# Altium PCB termometr.PcbDoc
Units mm, origin at the board's own origin, x right, y up, seen from the top; angles counter-clockwise.
Board outline 95 x 55 mm, 2 copper layers (Top Layer, Bottom Layer); 40 components, 40 nets, 140 pads, 4 vias.
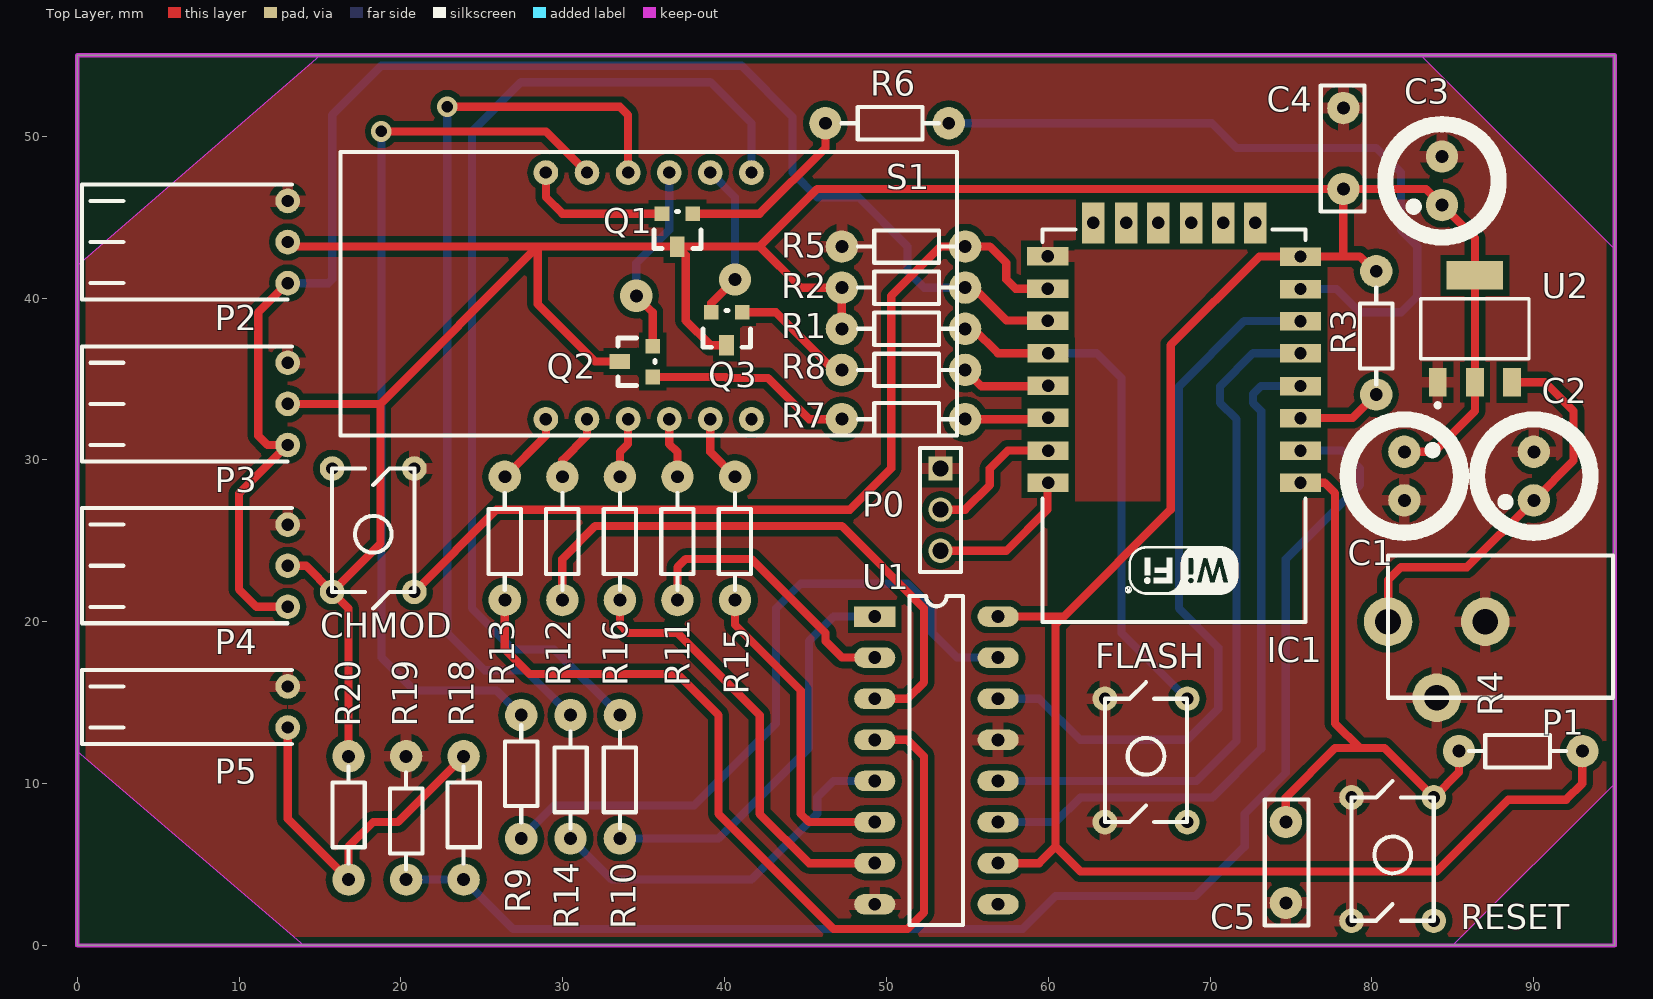
[diagram p0: Top Layer view]
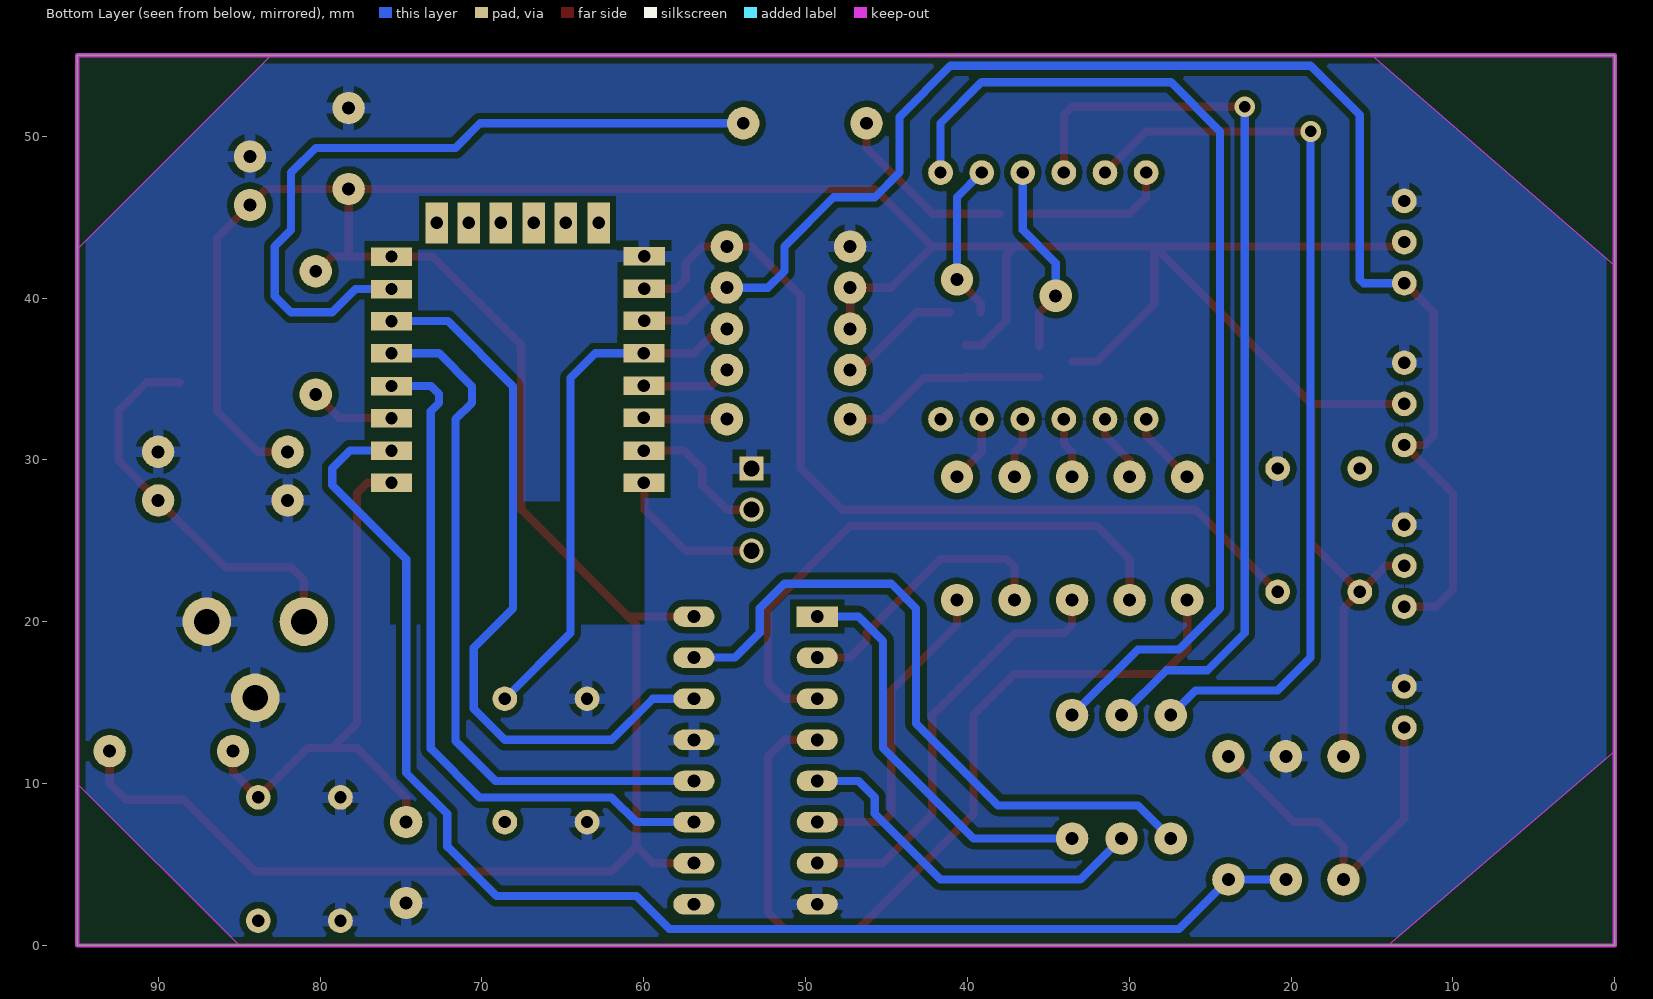
[diagram p1: Bottom Layer view, seen from below]

## Layer stack, top to bottom
Top Layer: signal copper 0.0356
Dielectric: dielectric 0.32, FR-4, Dk 4.8
Bottom Layer: signal copper 0.0356

## Board outline
0,0 95,0 95,55 0,55

## Design rules (kind name [scope] priority, off if disabled: settings)
Clearance [All] p1: gap=0.4
PolygonConnect [All] p1: connectstyle=Relief reliefconductorwidth=0.7 reliefentries=4 polygonreliefangle="90 Angle" airgapwidth=0.4
RoutingVias [All] p1: holewidth=0.711 width=1.27 viastyle="Through Hole" minholewidth=0.711 minwidth=1.27 maxholewidth=0.711 maxwidth=1.27
SilkscreenOverComponentPads [All] p1: minsilkscreentomaskgap=0.254
SolderMaskExpansion [All] p1: expansion=0.102
Width [All] p1: maxlimit=0.762 minlimit=0.381 preferedwidth=0.508 minimp=50.000000 maximp=50.000000 favimp=50.000000
27 further rules are at their usual default settings.

## Components (designator, comment, footprint, x,y, rotation, side; value= is the part's Value field where it differs from the comment)
C1 "10uF" "THT CAPACITOR_ELECTROLITIC" 90,29 r90 top
C2 "10uF" "THT CAPACITOR_ELECTROLITIC" 82,29 r270 top
C3 "100uF" "THT CAPACITOR_ELECTROLITIC" 84.328,47.244 r90 top
C4 "100nF" "THT CAP CERAMIC" 78.232,46.736 r90 top
C5 "100nF" "THT CAP CERAMIC" 74.676,7.62 r270 top
CHMOD "tact-switch" tact-switch 20.828,29.464 r180 top
FLASH "tact-switch" tact-switch 63.5,7.62 r0 top
IC1 "ESP8266 ESP-12-E" "ESP8266 ESP-12-E" 59,45 r180 top
P0 "PROGRAMING" "3pin 2.54" 53.34,29.464 r270 top
P1 "POWER" DC_BARREL 81,20 r270 top
P2 "ONEWIRE 1" "Molex KK 254 socket 3pin" 13,46 r270 top
P3 "ONEWIRE 2" "Molex KK 254 socket 3pin" 13,36 r270 top
P4 "ONEWIRE 3" "Molex KK 254 socket 3pin" 13,26 r270 top
P5 "THERMISTOR" "Molex KK 254 socket 2pin" 13,16 r270 top
Q1 "NPN" SOT-23 37.084,44.196 r180 top
Q2 "NPN" SOT-23 34.544,36.068 r90 top
Q3 "NPN" SOT-23 40.132,38.1 r180 top
R1 "10K" "THT resistor" 47.244,38.1 r0 top
R2 "4K7" "THT resistor" 47.244,40.64 r0 top
R3 "10K" "THT resistor" 80.264,41.656 r270 top
R4 "10K" "THT resistor" 93,12 r180 top
R5 "10K" "THT resistor" 47.244,43.18 r0 top
R6 "4K7" "THT resistor" 46.228,50.8 r0 top
R7 "4K7" "THT resistor" 47.244,32.512 r0 top
R8 "4K7" "THT resistor" 47.244,35.56 r0 top
R9 "100" "THT resistor" 27.432,6.604 r90 top
R10 "100" "THT resistor" 33.528,14.224 r270 top
R11 "100" "THT resistor" 37.084,28.956 r270 top
R12 "100" "THT resistor" 29.972,28.956 r270 top
R13 "100" "THT resistor" 26.416,28.956 r270 top
R14 "100" "THT resistor" 30.48,14.224 r270 top
R15 "100" "THT resistor" 40.64,28.956 r270 top
R16 "100" "THT resistor" 33.528,28.956 r270 top
R18 "220k(1%)" "THT resistor" 23.876,4.064 r90 top
R19 "100k(1%)" "THT resistor" 20.32,11.684 r270 top
R20 "10K" "THT resistor" 16.764,4.064 r90 top
RESET "tact-switch" tact-switch 78.74,1.524 r0 top
S1 "7seg display" "7SEG DISPLAY" 28.956,32.512 r0 top
U1 "74HC595N" 74HC595N 49.276,20.32 r0 top
U2 "TS1117BCW-3.3" SOT-223-2 86.36,38.1 r0 top

## Footprints (in the part's own frame and the unit in brackets; to place one, negate y for a bottom-side part, rotate by r counter-clockwise, add the part's x,y. Pads: shape width x height; smd on the part's side, far side on the other; paste and mask are expansions set on the pad)
"3pin 2.54" [mm] "Listwa ko³kowa, raster 2.54mm"
  rect 1.5x1.5 hole 1: 1(0,0)
  round 1.5 hole 1: 2(2.54,0) 3(5.08,0)
  silkscreen extent -1.27,-1.27 6.4,1.27
"7SEG DISPLAY" [mil] "Wyœwietlacz siedmiosegmentowy 3-cyfrowy"
  round 60 hole 30: 1(0,600) 2(100,600) 3(200,600) 4(300,600) 5(400,600) 6(500,600) 7(500,0) 8(400,0) 9(300,0) 10(200,0) 11(100,0) 12(0,0)
  silkscreen extent -500,-40 1000,650
74HC595N [mil]
  rect 100x50 hole 31.5: 1(0,0)
  oval 100x50 hole 31.5: 2(0,-100) 3(0,-200) 4(0,-300) 5(0,-400) 6(0,-500) 7(0,-600) 8(0,-700) 9(300,-700) 10(300,-600) 11(300,-500) 12(300,-400) 13(300,-300) 14(300,-200) 15(300,-100) 16(300,0)
  silkscreen extent 85,-750 215,50
DC_BARREL [mm]
  round 3 hole 1.6: 1(0,6) 1(4.7,3) 2(0,0)
  silkscreen extent -4.1,0 4.7,13.9
"ESP8266 ESP-12-E" [mil] "ESP8266 ESP-12-E"
  rect 100x45 hole 30: 1(-653,646) 2(-653,568) 3(-653,489) 4(-653,411) 5(-653,331) 6(-653,253) 7(-653,175) 8(-653,96) 15(-38,95) 16(-38,174) 17(-38,252) 18(-39,331) 19(-39,410) 20(-39,488) 21(-39,568) 22(-39,646)
  rect 55x100 hole 30: 9(-543,14) 10(-465,14) 11(-387,14) 12(-307,14) 13(-229,14) 14(-149,14)
  silkscreen extent -665,30 -25,985, body extent -660,38 -30,982, height 86
"Molex KK 254 socket 2pin" [mil]
  round 60 hole 30: 1(0,0) 2(100,0)
  silkscreen extent -40,-500 140,10
"Molex KK 254 socket 3pin" [mil]
  round 60 hole 30: 1(0,0) 2(100,0) 3(200,0)
  silkscreen extent -40,-500 240,10
SOT-23 [mil]
  rect 36x36 smd: 1(-37.5,-40) 2(37.5,-40)
  rect 36x50 smd: 3(0.5,40)
  silkscreen extent -57,-45 57,45, body extent -59,-58 59,66, height 43
SOT-223-2 [mm] "SOT-223/SC-73; 4 Leads; Body 6.7 x 7.3 mm, inc. leads (LxW max)"
  rect 1.1x1.75 smd: 1(-2.3,-3.3) 2(0,-3.3) 3(2.3,-3.3)
  rect 3.5x1.75 smd: 2(0,3.3)
  silkscreen extent -3.35,-4.85 3.35,1.85, body extent -3.35,-3.7 3.35,3.5, height 1.85
tact-switch [mil]
  round 60 hole 30: 1(0,0) 2(200,0) 3(200,300) 4(0,300)
  silkscreen extent 0,0 200,340
"THT CAP CERAMIC" [mm]
  round 2 hole 0.8: 1(0,0) 2(5,0)
  silkscreen extent -1.4,-1.3 6.4,1.4
"THT CAPACITOR_ELECTROLITIC" [mm]
  round 2 hole 0.8: 1(-1.5,0) 2(1.5,0)
  silkscreen extent -3.5,-3.5 3.5,3.5
"THT resistor" [mm]
  round 2 hole 0.8: 1(0,0) 2(7.62,0)
  silkscreen extent 1,-1 7,1

## Part data
C1 C2 C3: library part "C Pol", "Polarized Capacitor"
C4 C5: library part CAP, "capacitor"
P0 P2 P3 P4: library part "Header 3", "Header, 3-Pin"
P1 P5: library part "Header 2", "Header, 2-Pin"
R1 R2 R3 R4 R5 R6 R7 R8 R9 R10 R11 R12 R13 R14 R15 R16 R20: library part RES, "resistor"
R18 R19: library part SMT_R_0402, "Surface mount resistor 0402"
U2: library part "ldo sot-223"

## Via types
v1: diameter 1.27, hole 0.711, Top Layer to Bottom Layer, 2 vias
v2: diameter 2, hole 0.8, Top Layer to Bottom Layer, 2 vias

## Nets (pads, with @x,y where several pads share a name; then routed paths per layer and width w, separated by ;. In a path a pad name is that pad's centre, name@x,y a point inside that pad or via, vN(x,y) a via of type N, cw(c..) or ccw(c..) an arc to the next point about the centre after c; other vN are vias at no path point)
3V3: C2.1 C3.1 C4.1 CHMOD.3 IC1.8 P2.2 P3.2 P4.2 Q1.3 Q2.3 Q3.3 R1.1 R2.1 R3.1 R4.1 R20.2 U1.10 U1.16 U2.2 | length 269.3
  Top Layer w0.508: P4.2 14.132,23.46 CHMOD.3 ; P3.2 18.728,33.46 ; P2.2 13.28,43.18 28.448,43.18 ; R20.2 16.764,20.828 CHMOD.3 ; Q2.3 31.991,36.081 28.448,39.624 28.448,43.18 ; 33.528,43.18 28.448,43.18 ; Q3.3 39.116,37.084 37.592,38.608 37.592,42.659 Q1.3 ; R1.1 R2.1 44.704,40.64 42.164,43.18 ; U1.10 59.436,5.08 60.452,6.096 ; U1.16 60.96,20.32 ; R3.1 80.154,41.656 79.248,42.562 78.232,42.562 ; C2.1 83.84,30.5 86.36,33.02 86.36,34.8 86.36,41.4 86.36,43.712 C3.1 83.336,46.736 C4.1 ; R4.1 93,10 92,9 88.428,9 84,4.572 61.976,4.572 60.452,6.096 ; CHMOD.3 18.728,24.824 18.728,33.46 ; 18.728,33.46 28.448,43.18 ; 28.448,43.18 Q1.3 ; Q1.3 42.164,43.18 ; 42.164,43.18 45.72,46.736 C4.1 ; 60.452,6.096 60.452,19.812 60.96,20.32 ; 60.96,20.32 67.564,26.924 67.564,37.084 73.042,42.562 IC1.8 78.232,42.562 ; 78.232,42.562 C4.1
5V: C1.1 P1.2 U2.3 | length 24.7
  Top Layer w0.508: P1.2 81,22.58 81.788,23.368 85.868,23.368 C1.1 92.456,29.956 92.456,33.02 90.676,34.8 U2.3
A: R9.2 S1.2 | length 56.4
  Top Layer w0.508: v1(18.796,50.292) 28.956,50.292 S1.2
  Bottom Layer w0.508: v1(18.796,50.292) 18.796,17.78 20.828,15.748 25.908,15.748 R9.2
ADC: IC1.2 R18.1 R19.2 | length 85.6
  Bottom Layer w0.508: R19.2 R18.1 26.924,1.016 58.42,1.016 60.452,3.048 69.088,3.048 72.136,6.096 72.136,8.128 74.676,10.668 74.676,23.876 79.248,28.448 79.248,29.464 78.139,30.573 IC1.2
"ADC EX": P5.2 R18.2 R20.1 | length 22.4
  Top Layer w0.508: P5.2 13,7.828 R20.1 16.764,6.096 18.288,7.62 19.812,7.62 R18.2
B: R10.1 S1.6 | length 64
  Bottom Layer w0.508: R10.1 29.464,18.288 26.924,18.288 24.384,20.828 24.384,50.292 27.432,53.34 39.116,53.34 41.656,50.8 S1.6
C: R11.1 S1.9 | length 3.8
  Top Layer w0.508: S1.9 36.576,30.988 37.084,30.48 R11.1
D: R12.1 S1.11 | length 4.2
  Top Layer w0.508: R12.1 29.972,29.972 31.496,31.496 S1.11
DP: R16.1 S1.10 | length 3.8
  Top Layer w0.508: R16.1 33.528,30.48 34.036,30.988 S1.10
E: R13.1 S1.12 | length 4.6
  Top Layer w0.508: R13.1 28.956,31.496 S1.12
EN: IC1.3 R3.2 | length 5.3
  Top Layer w0.508: IC1.3 78.807,32.579 R3.2
F: R14.1 S1.3 | length 57.2
  Top Layer w0.508: v1(22.86,51.816) 33.528,51.816 34.036,51.308 S1.3
  Bottom Layer w0.508: v1(22.86,51.816) 22.86,19.304 25.164,17 27.704,17 R14.1
G: R15.1 S1.8 | length 4.2
  Top Layer w0.508: S1.8 39.116,30.48 R15.1
GND: C1.2 C2.2 C3.2 C4.2 C5.2 CHMOD.1 FLASH.1 FLASH.4 IC1.15 P0.1 P1.1 P2.1 P3.1 P4.1 P5.1 R5.1 R19.1 RESET.1 RESET.4 U1.8 U1.13 U2.1
GPIO0: FLASH.3 IC1.18 R1.2 | length 32.4
  Top Layer w0.508: R1.2 55.372,38.1 56.879,36.593 IC1.18
  Bottom Layer w0.508: IC1.18 62.975,36.593 64.516,35.052 64.516,19.304 FLASH.3
GPIO2: IC1.17 P2.3 P3.3 P4.3 R2.2 | length 93.8
  Top Layer w0.508: P4.3 11.08,20.92 10,22 10,27.92 P3.3 11.752,30.92 11.176,31.496 11.176,39.096 P2.3 ; R2.2 55.372,40.64 57.404,38.608 59.956,38.608 IC1.17
  Bottom Layer w0.508: P2.3 15.52,40.92 15.748,41.148 15.748,51.308 18.796,54.356 41.04,54.356 44.196,51.2 44.196,47.752 45.72,46.228 48.26,46.228 51.308,43.18 51.308,41.656 52.324,40.64 R2.2
GPIO4: IC1.19 R8.2 | length 5.6
  Top Layer w0.508: R8.2 55.88,34.544 59.949,34.544 IC1.19
GPIO5: IC1.20 R7.2 | length 5.2
  Top Layer w0.508: R7.2 59.898,32.512 IC1.20
GPIO12: IC1.6 U1.14 | length 45.6
  Bottom Layer w0.508: U1.14 59.436,15.24 61.976,12.7 68.58,12.7 70.5,14.62 70.5,18.4 68.072,20.828 68.072,34.544 72.102,38.574 IC1.6
GPIO13: IC1.7 R6.2 | length 45.5
  Bottom Layer w0.508: R6.2 70.104,50.8 71.628,49.276 80.264,49.276 81.788,47.752 81.788,44.196 82.804,43.18 82.804,40.132 81.788,39.116 79.248,39.116 77.809,40.555 IC1.7
GPIO14: IC1.5 U1.12 | length 43.9
  Bottom Layer w0.508: U1.12 69.16,10.16 71.628,12.628 71.628,32.512 70.612,33.528 70.612,34.544 72.661,36.593 IC1.5
GPIO15: CHMOD.4 IC1.16 R5.2 | length 55.9
  Top Layer w0.508: CHMOD.4 25.908,26.924 47.752,26.924 50.292,29.464 50.292,40.132 53.34,43.18 R5.2 56.388,43.18 57.404,42.164 57.404,41.148 57.972,40.58 IC1.16
GPIO16: IC1.4 U1.11 | length 43.4
  Bottom Layer w0.508: U1.11 60.452,7.62 61.976,9.144 70.144,9.144 73.152,12.152 73.152,33.02 72.644,33.528 72.644,34.069 73.135,34.561 IC1.4
NetQ1_1: Q1.1 R6.1 | length 11.4
  Top Layer w0.508: Q1.1 42.164,45.212 46.228,49.276 R6.1
NetQ1_2: Q1.2 S1.1 | length 9.1
  Top Layer w0.508: S1.1 28.956,46.228 29.972,45.212 Q1.2
NetQ2_1: Q2.1 R7.1 | length 12.8
  Top Layer w0.508: Q2.1 40.069,35.115 40.132,35.052 42.672,35.052 45.212,32.512 R7.1
NetQ2_2: Q2.2 S1.4 | length 12
  Top Layer w0.508: v2(34.544,40.132) 35.56,39.116 Q2.2
  Bottom Layer w0.508: v2(34.544,40.132) 34.544,42.164 36.576,44.196 S1.4
NetQ3_1: Q3.1 R8.1 | length 7.6
  Top Layer w0.508: Q3.1 43.18,39.116 46.736,35.56 R8.1
NetQ3_2: Q3.2 S1.5 | length 9.9
  Top Layer w0.508: Q3.2 39.179,39.688 v2(40.64,41.148)
  Bottom Layer w0.508: S1.5 40.64,46.228 v2(40.64,41.148)
NetR9_1: R9.1 U1.15 | length 42.9
  Bottom Layer w0.508: R9.1 29.464,8.636 38.1,8.636 43.18,13.716 43.18,20.828 44.704,22.352 51.308,22.352 52.832,20.828 52.832,19.304 54.356,17.78 U1.15
NetR10_2: R10.2 U1.1 | length 25.3
  Bottom Layer w0.508: R10.2 39.624,6.604 45.212,12.192 45.212,18.796 46.736,20.32 U1.1
NetR11_2: R11.2 U1.2 | length 17.3
  Top Layer w0.508: R11.2 37.084,23.368 37.592,23.876 41.656,23.876 46.228,19.304 46.228,18.796 47.244,17.78 U1.2
NetR12_2: R12.2 U1.3 | length 35.9
  Top Layer w0.508: R12.2 29.972,23.876 32.004,25.908 47.244,25.908 52.324,20.828 52.324,16.256 51.308,15.24 U1.3
NetR13_2: R13.2 U1.4 | length 53.2
  Top Layer w0.508: R13.2 26.416,18.288 27.94,16.764 37.084,16.764 39.624,14.224 39.624,8.128 46.736,1.016 51.308,1.016 52.324,2.032 52.324,11.684 51.308,12.7 U1.4
NetR14_2: R14.2 U1.5 | length 23
  Bottom Layer w0.508: R14.2 33.02,4.064 41.656,4.064 45.72,8.128 45.72,9.144 46.736,10.16 U1.5
NetR15_2: R15.2 U1.6 | length 19.7
  Top Layer w0.508: R15.2 40.64,19.812 44.704,15.748 44.704,8.128 45.212,7.62 U1.6
NetR16_2: R16.2 U1.7 | length 26.9
  Top Layer w0.508: R16.2 33.528,19.812 34.036,19.304 37.084,19.304 42.164,14.224 42.164,8.128 45.212,5.08 U1.7
RESET: C5.1 IC1.1 R4.2 RESET.3 | length 35.5
  Top Layer w0.508: C5.1 74.676,9.144 77.724,12.192 79.248,12.192 ; IC1.1 77.072,28.592 77.724,27.94 77.724,13.716 79.248,12.192 ; R4.2 85.38,10.704 RESET.3 80.772,12.192 79.248,12.192
RX0: IC1.21 P0.2 | length 8.8
  Top Layer w0.508: P0.2 54.864,26.924 56.388,28.448 56.388,29.464 57.497,30.573 IC1.21
TX0: IC1.22 P0.3 | length 9.3
  Top Layer w0.508: P0.3 57.404,24.384 59.944,26.924 59.944,28.545 IC1.22
pads on no net: CHMOD.2 FLASH.2 IC1.9 IC1.10 IC1.11 IC1.12 IC1.13 IC1.14 RESET.2 S1.7 U1.9

## Polygon pours and split planes (outlines as drawn)
GND on Bottom Layer "Bottom Layer-No Net" (solid, remove dead copper, pour order 4): 0,0 0,54.864 94.86,54.864 94.996,55 95,54.996 95,0 0,0
GND on Top Layer "Bottom Layer-No Net" (solid, remove dead copper, pour order 2): 0,55 0.136,54.864 94.996,54.864 94.996,0.004 95,0 94.492,-0.508 0,-0.508

## Keep-outs
Keep-Out Layer:
  pour cut-out: 0,55 0,42 15,55
  pour cut-out: 95,55 83,55 95,43
  pour cut-out: 95,0 85,0 95,10
  pour cut-out: 0,0 0,12 14,0
  lines w0.254: 0,0 95,0 95,55 0,55 0,0

## Other copper
Top Layer:
  pour cut-out: 59.436,19.812 59.944,20.32 59.944,27.432 75.692,27.432 75.692,19.812
Bottom Layer:
  pour cut-out: 59.944,19.812 59.944,27.432 75.692,27.432 75.692,19.812

## Text inside footprints (layer, text, board x,y; h text height)
IC1: Mechanical 13 "CUTOUT POLYGON" at 75.256,21.378 h0.25 r180; Mechanical 13 "ANTENNA AREA" at 75.002,20.743 h0.25 r180